# EAGLE board promini2via5.5mm (EAGLE 9.6.2)
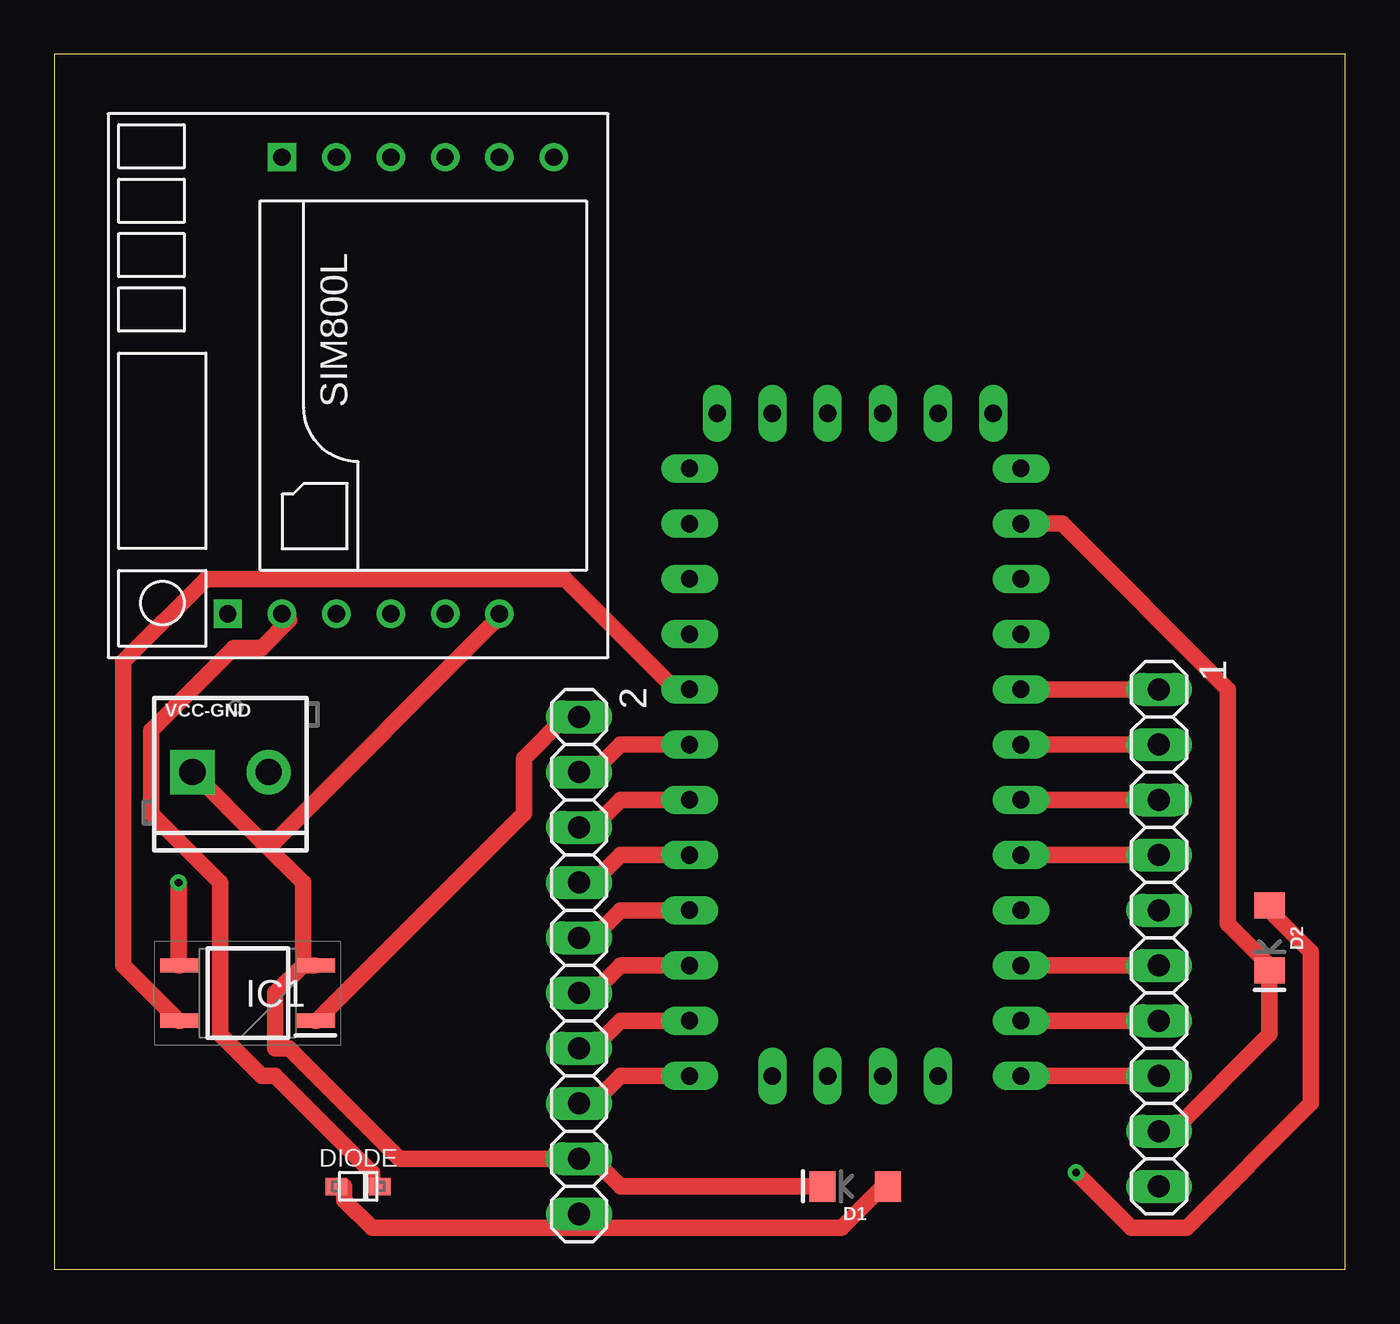
[diagram p0: board, top side]
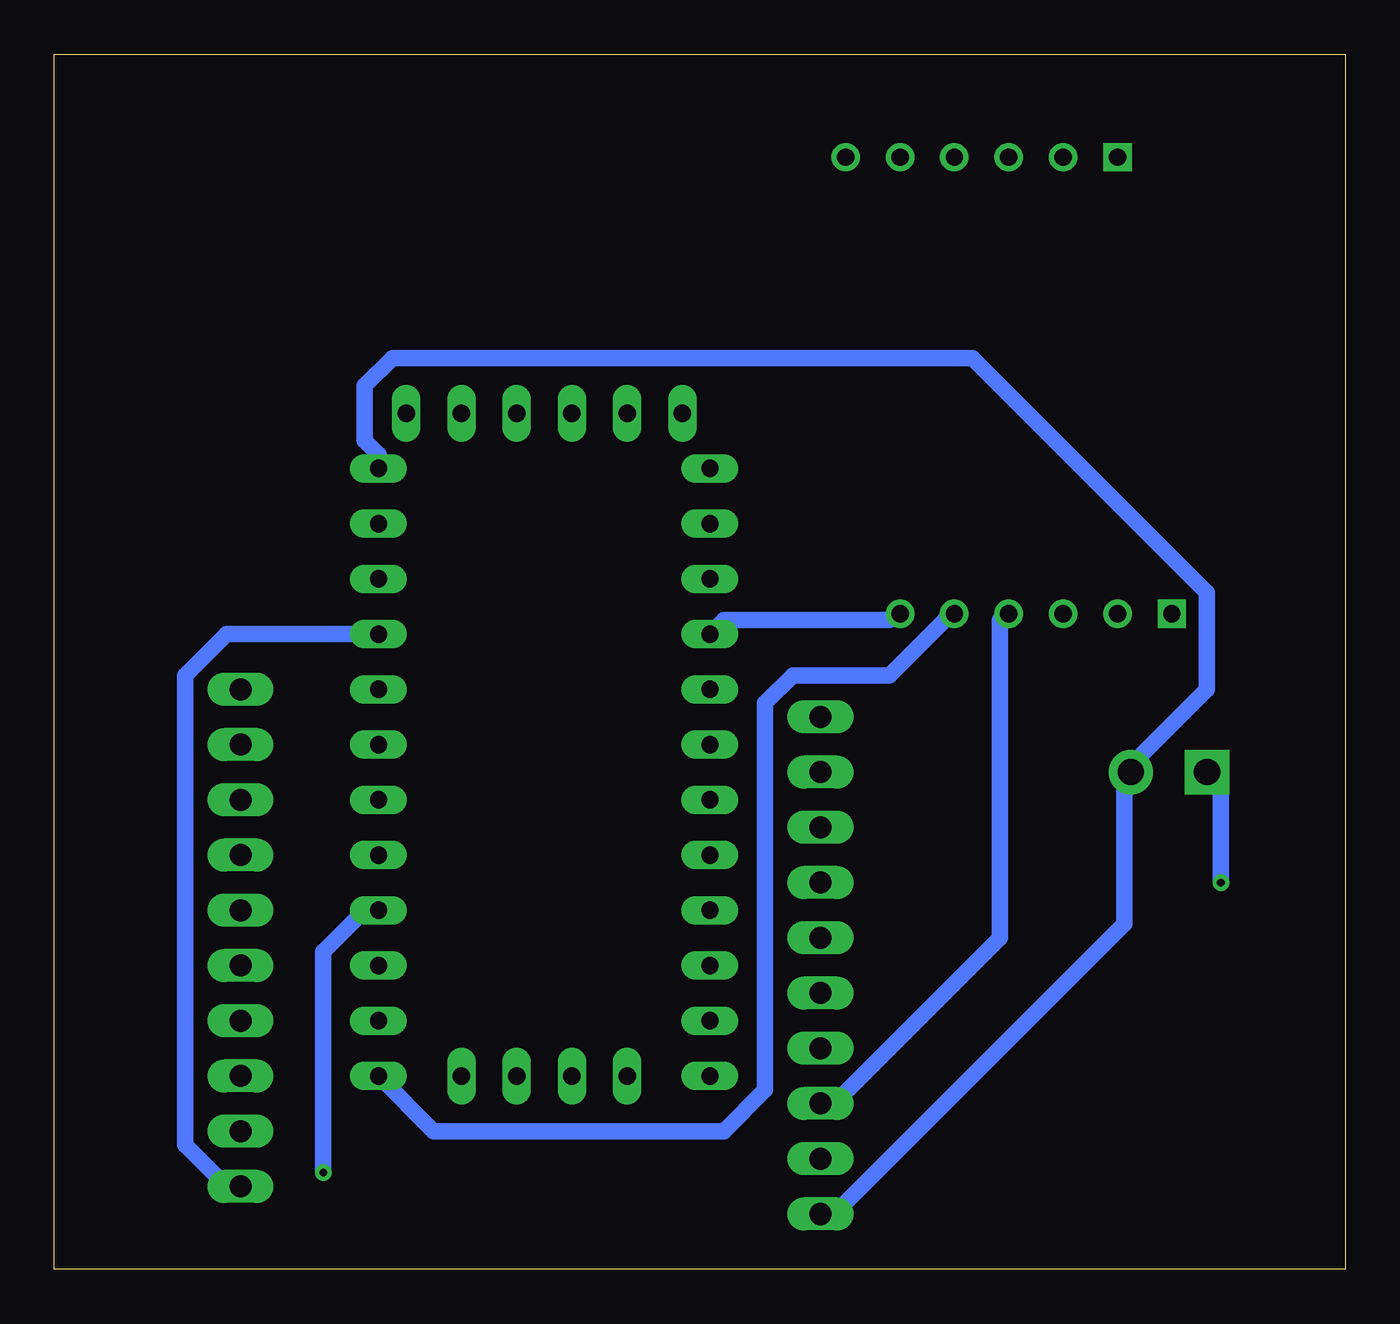
[diagram p1: board, bottom side, seen from below]

Size 59.36 x 55.87 mm. Coordinates in mm from the lower left corner, seen from the top.
Outline: 0,0 59.36,0 59.36,55.87 0,55.87 0,0
Copper layers (1*16): Top 0.035mm / dielectric 1.5mm / Bottom 0.035mm
Design rules "default *": minimum track width 30mil, minimum drill 0.35mm, track to track 20mil, track to pad 20mil, pad to pad 6mil, via to via 6mil, smd to smd 6mil, copper to edge 40mil, drill to drill 6mil, minimum pad ring 10mil, minimum via ring 8mil, stop-mask expansion 4mil, vias tented up to drill 0mil, thermal gap 10mil

## Footprints (pad centres in the part's own frame; a part is rotated, then mirrored left to right if it is on the bottom)
1X10 = drill 1.016 long: 1 -11.43,0; 2 -8.89,0; 3 -6.35,0; 4 -3.81,0; 5 -1.27,0; 6 1.27,0; 7 3.81,0; 8 6.35,0; 9 8.89,0; 10 11.43,0
LED-1206 = smd 1.2 x 1.4: A -1.5,0; C 1.5,0
SOD-323F = smd 1 x 0.8: A -1,0; C 1,0
SOP254P700X200-4N = smd 1.825 x 0.65: 1 -3.112,1.27; 2 -3.112,-1.27; 3 3.112,-1.27; 4 3.112,1.27
PRO-MINI = drill 0.8 long: A0 8.89,8.89; A1 8.89,11.43; A2 8.89,13.97; A3 8.89,16.51; A4 -2.54,-1.27; A5 0,-1.27; A6 2.54,-1.27; A7 5.08,-1.27; D2 -6.35,16.51; D3 -6.35,13.97; D4 -6.35,11.43; D5 -6.35,8.89; D6 -6.35,6.35; D7 -6.35,3.81; D8 -6.35,1.27; D9 -6.35,-1.27; D10 8.89,-1.27; D11 8.89,1.27; D12 8.89,3.81; D13 8.89,6.35; DTR 7.62,29.21; GND 8.89,24.13; GND1 -6.35,19.05; GND2 -5.08,29.21; GND3 -2.54,29.21; RAW 8.89,26.67; RST 8.89,21.59; RST1 -6.35,21.59; RX1 -6.35,24.13; RX1-1 2.54,29.21; TX0 -6.35,26.67; TX0-1 5.08,29.21; VCC 8.89,19.05; VCC1 0,29.21
SIM800LMODULE = drill 0.8: DTR 10.5,1; GND -10.5,-6.5; MIC+ 10.5,-1.5; MIC- 10.5,-4; RST -10.5,1; RX -10.5,-1.5; SPK+ 10.5,-6.5; SPK- 10.5,-9; TX -10.5,-4; VCC -10.5,3.5 | drill 0.8 square: NET -10.5,6; RING 10.5,3.5
SCREWTERMINAL-3.5MM-2 = drill 1.2 pad 2.032 square: 1 0,0 | drill 1.2 pad 2.032: 2 3.5,0

## Placement (x,y rotation side)
1  [1X10]  50.8,15.24 270 top
2  [1X10]  24.13,13.97 270 top
D1  RED  [LED-1206]  36.83,3.81 180 top
D2  RED  [LED-1206]  55.88,15.24 270 top
DIODE  [SOD-323F]  13.97,3.81 0 top
IC1  EL357N-B-TA-G  [SOP254P700X200-4N]  8.89,12.7 180 top
PROMINI  PRO-MINI  [PRO-MINI]  35.56,10.16 0 top
U$1  SIM800LMODULE  [SIM800LMODULE]  13.97,40.64 90 top
VCC-GND  [SCREWTERMINAL-3.5MM-2]  6.35,22.86 0 top

## Library data of the parts
1 2 = pinhead
D1 D2 = SparkFun-LED; PROD_ID: DIO-09912
DIODE = adafruit
IC1 = EL357N-B-TA-G; DESCRIPTION: Optoisolator Transistor Output 3750Vrms 1 Channel 4-SOP (2.54mm); HEIGHT: 2mm; MANUFACTURER_NAME: Everlight Elec; MANUFACTURER_PART_NUMBER: EL357N-B-TA-G
PROMINI = Arduino-clone
U$1 = SIM800LMODULE
VCC-GND = SparkFun-Retired; PROD_ID: CONN-08399

## Nets
D2,D3,D4,D5-IO0,D6-IO2,D7-IO4,D8-IO5,D9-IO9,GND,VIN: 2.6 PROMINI.D7
N$1: 2.10 D1.A DIODE.A PROMINI.RAW VCC-GND.2
N$3: DIODE.C U$1.VCC
N$4: 1.10 PROMINI.VCC
N$5: IC1.4 PROMINI.D2
N$6: 2.8 PROMINI.D9 U$1.RX
N$8: 2.1 IC1.1
N$9: 2.2 PROMINI.D3
N$10: 2.3 PROMINI.D4
N$11: 2.4 PROMINI.D5
N$12: 2.5 PROMINI.D6
N$14: 2.7 PROMINI.D8
N$16: 1.1 PROMINI.A3
N$17: 1.2 PROMINI.A2
N$18: 1.3 PROMINI.A1
N$19: 1.4 PROMINI.A0
N$20: D2.A PROMINI.D13
N$21: 1.6 PROMINI.D12
N$22: 1.7 PROMINI.D11
N$23: 1.8 PROMINI.D10 U$1.TX
N$24: 1.9 D2.C PROMINI.GND
N$26: 2.9 D1.C IC1.2 IC1.3 PROMINI.GND1 U$1.GND VCC-GND.1

## Tracks (layer width: path | path; a pad name or v marks a point on that pad's centre or on a via)
D2,D3,D4,D5-IO0,D6-IO2,D7-IO4,D8-IO5,D9-IO9,GND,VIN
  Top 0.762: PROMINI.D7 26.04,13.97 24.77,12.7 2.6
N$1
  Top 0.762: 23.5,1.91 14.61,1.91 13.34,3.17 13.34,3.81 DIODE.A | 23.5,1.91 36.2,1.91 38.1,3.81 D1.A | 23.5,1.91 2.10
  Bottom 0.762: PROMINI.RAW 44.45,37.47 45.09,38.1 45.09,40.64 43.81,41.91 17.14,41.91 6.35,31.11 6.35,26.67 10.16,22.86 | 2.10 23.5,2.54 10.16,15.88 10.16,22.86 | 10.16,22.86 VCC-GND.2
N$3
  Top 0.762: DIODE.C 14.61,3.81 14.61,4.45 10.16,8.89 9.53,8.89 7.62,10.79 7.62,17.78 4.45,20.95 4.45,24.77 8.26,28.57 9.53,28.57 10.79,29.84 U$1.VCC
N$4
  Bottom 0.762: PROMINI.VCC 51.44,29.21 53.34,27.3 53.34,5.71 51.44,3.81 1.10
N$5
  Top 0.762: PROMINI.D2 28.57,26.67 23.5,31.75 6.99,31.75 3.17,27.94 3.17,13.97 5.71,11.43 IC1.4
N$6
  Top 0.762: PROMINI.D9 26.04,8.89 24.77,7.62 2.8
  Bottom 0.762: 2.8 23.5,7.62 15.88,15.24 15.88,29.84 U$1.RX
N$8
  Top 0.762: 2.1 23.5,25.4 21.59,23.5 21.59,20.95 12.06,11.43 IC1.1
N$9
  Top 0.762: PROMINI.D3 26.04,24.13 24.77,22.86 2.2
N$10
  Top 0.762: PROMINI.D4 26.04,21.59 24.77,20.32 2.3
N$11
  Top 0.762: PROMINI.D5 26.04,19.05 24.77,17.78 2.4
N$12
  Top 0.762: PROMINI.D6 26.04,16.51 24.77,15.24 2.5
N$14
  Top 0.762: PROMINI.D8 26.04,11.43 24.77,10.16 2.7
N$16
  Top 0.762: 1.1 PROMINI.A3
N$17
  Top 0.762: 1.2 PROMINI.A2
N$18
  Top 0.762: 1.3 PROMINI.A1
N$19
  Top 0.762: 1.4 PROMINI.A0
N$20  (via drill 0.35)
  Top 0.762: v46.99,4.45 49.53,1.91 52.07,1.91 57.78,7.62 57.78,14.61 55.88,16.51 D2.A
  Bottom 0.762: v46.99,4.45 46.99,14.61 45.09,16.51 PROMINI.D13
N$21
  Top 0.762: 1.6 PROMINI.D12
N$22
  Top 0.762: 1.7 PROMINI.D11
N$23
  Top 0.762: PROMINI.D10 1.8
  Bottom 0.762: PROMINI.D10 41.91,6.35 28.57,6.35 26.67,8.26 26.67,26.04 25.4,27.3 20.95,27.3 18.41,29.84 U$1.TX
N$24
  Top 0.762: 1.9 51.44,6.35 55.88,10.79 D2.C 55.88,13.97 53.98,15.88 53.98,26.67 46.35,34.29 PROMINI.GND
N$26  (via drill 0.35)
  Top 0.762: D1.C 26.04,3.81 24.77,5.08 2.9 15.88,5.08 10.79,10.16 10.16,10.16 10.16,12.7 11.43,13.97 | v5.71,17.78 5.71,13.97 IC1.3 | 11.43,13.97 11.43,17.78 9.53,19.68 | VCC-GND.1 9.53,19.68 | 9.53,19.68 10.16,19.68 20.32,29.84 U$1.GND | 11.43,13.97 IC1.2
  Bottom 0.762: PROMINI.GND1 28.57,29.84 20.95,29.84 U$1.GND | v5.71,17.78 5.71,22.23 VCC-GND.1